# Altium PCB CircleBatBoard.PcbDoc
Units mil, origin at the board's own origin, x right, y up, seen from the top; angles counter-clockwise.
Board outline 1798.76 x 1455 mil, 2 copper layers (Top Layer, Bottom Layer); 12 components, 2 nets, 36 pads, 0 vias.
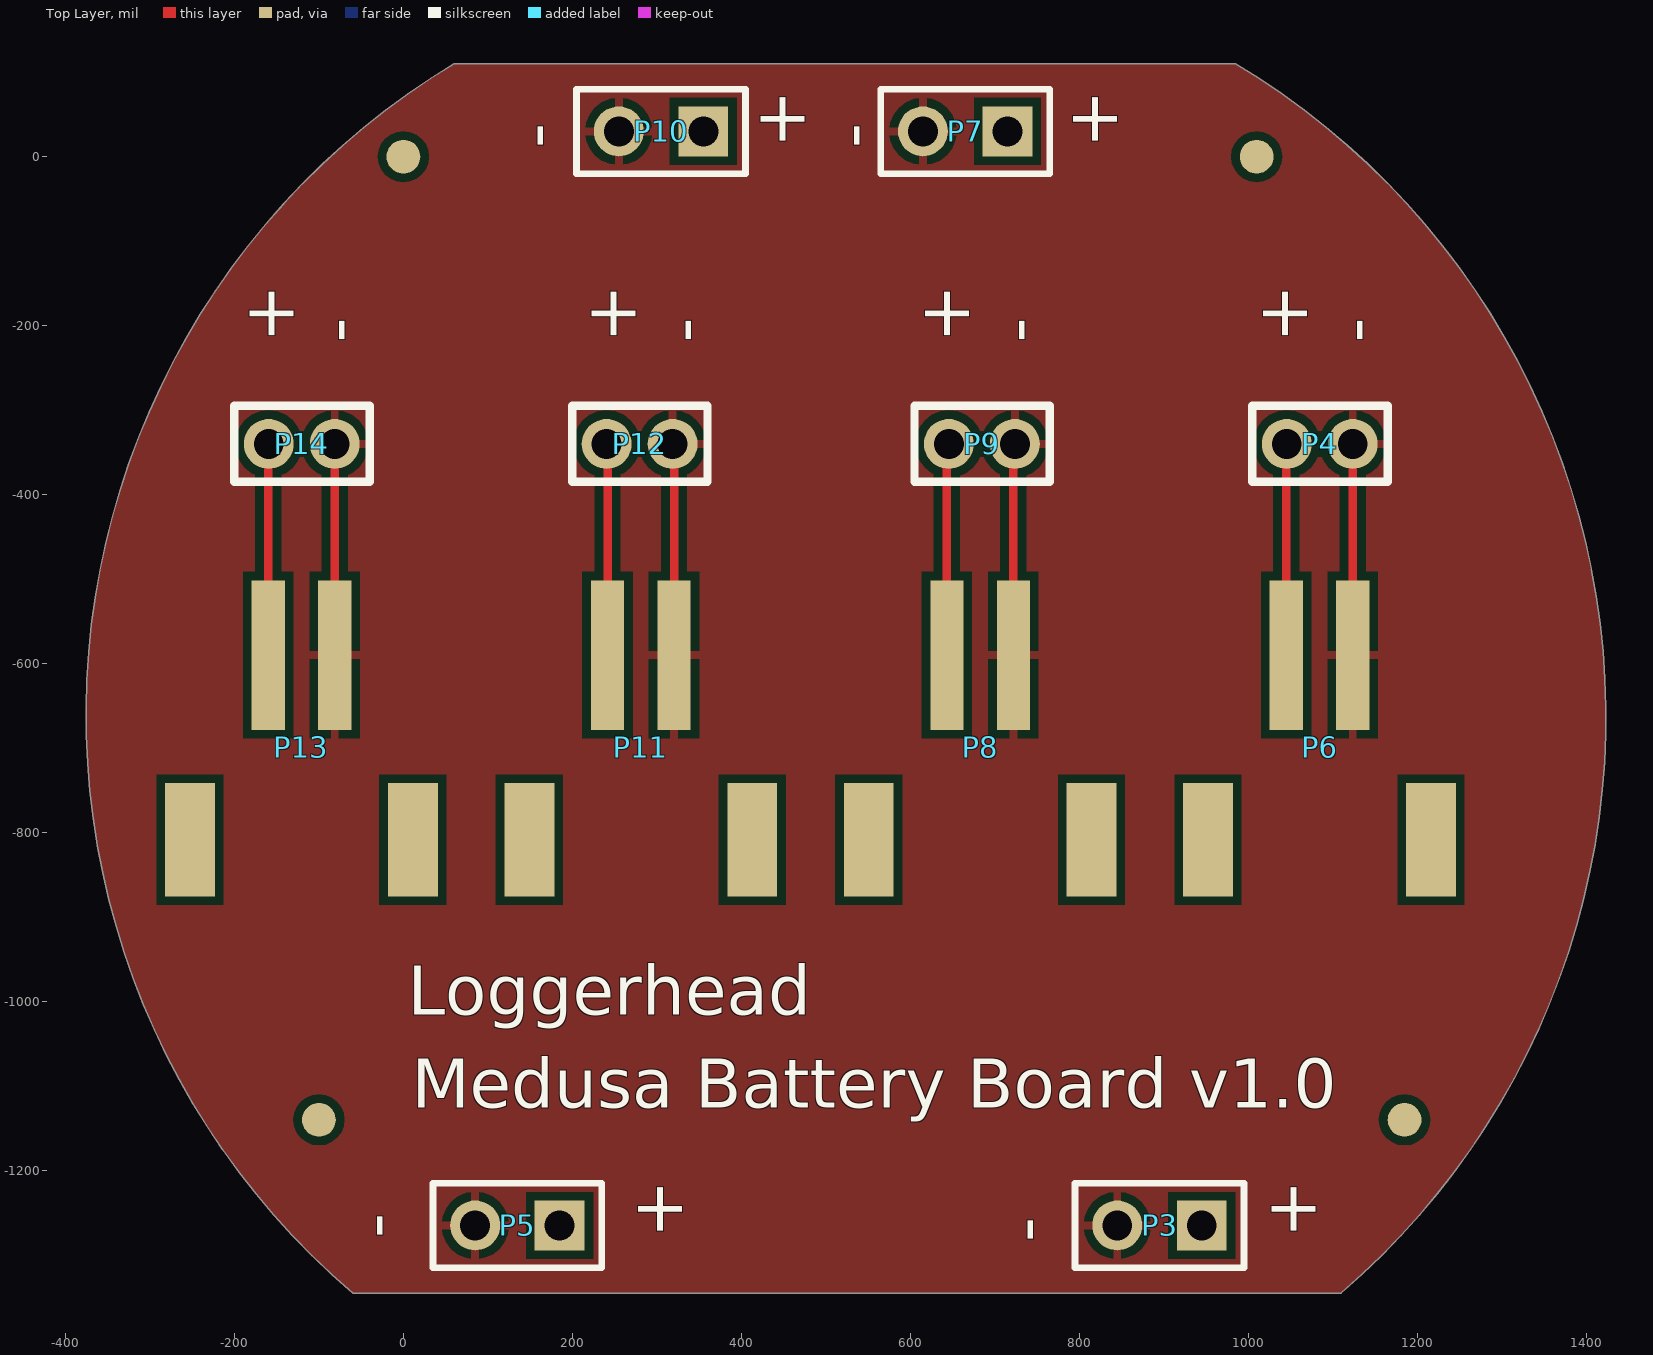
[diagram p0: Top Layer view]
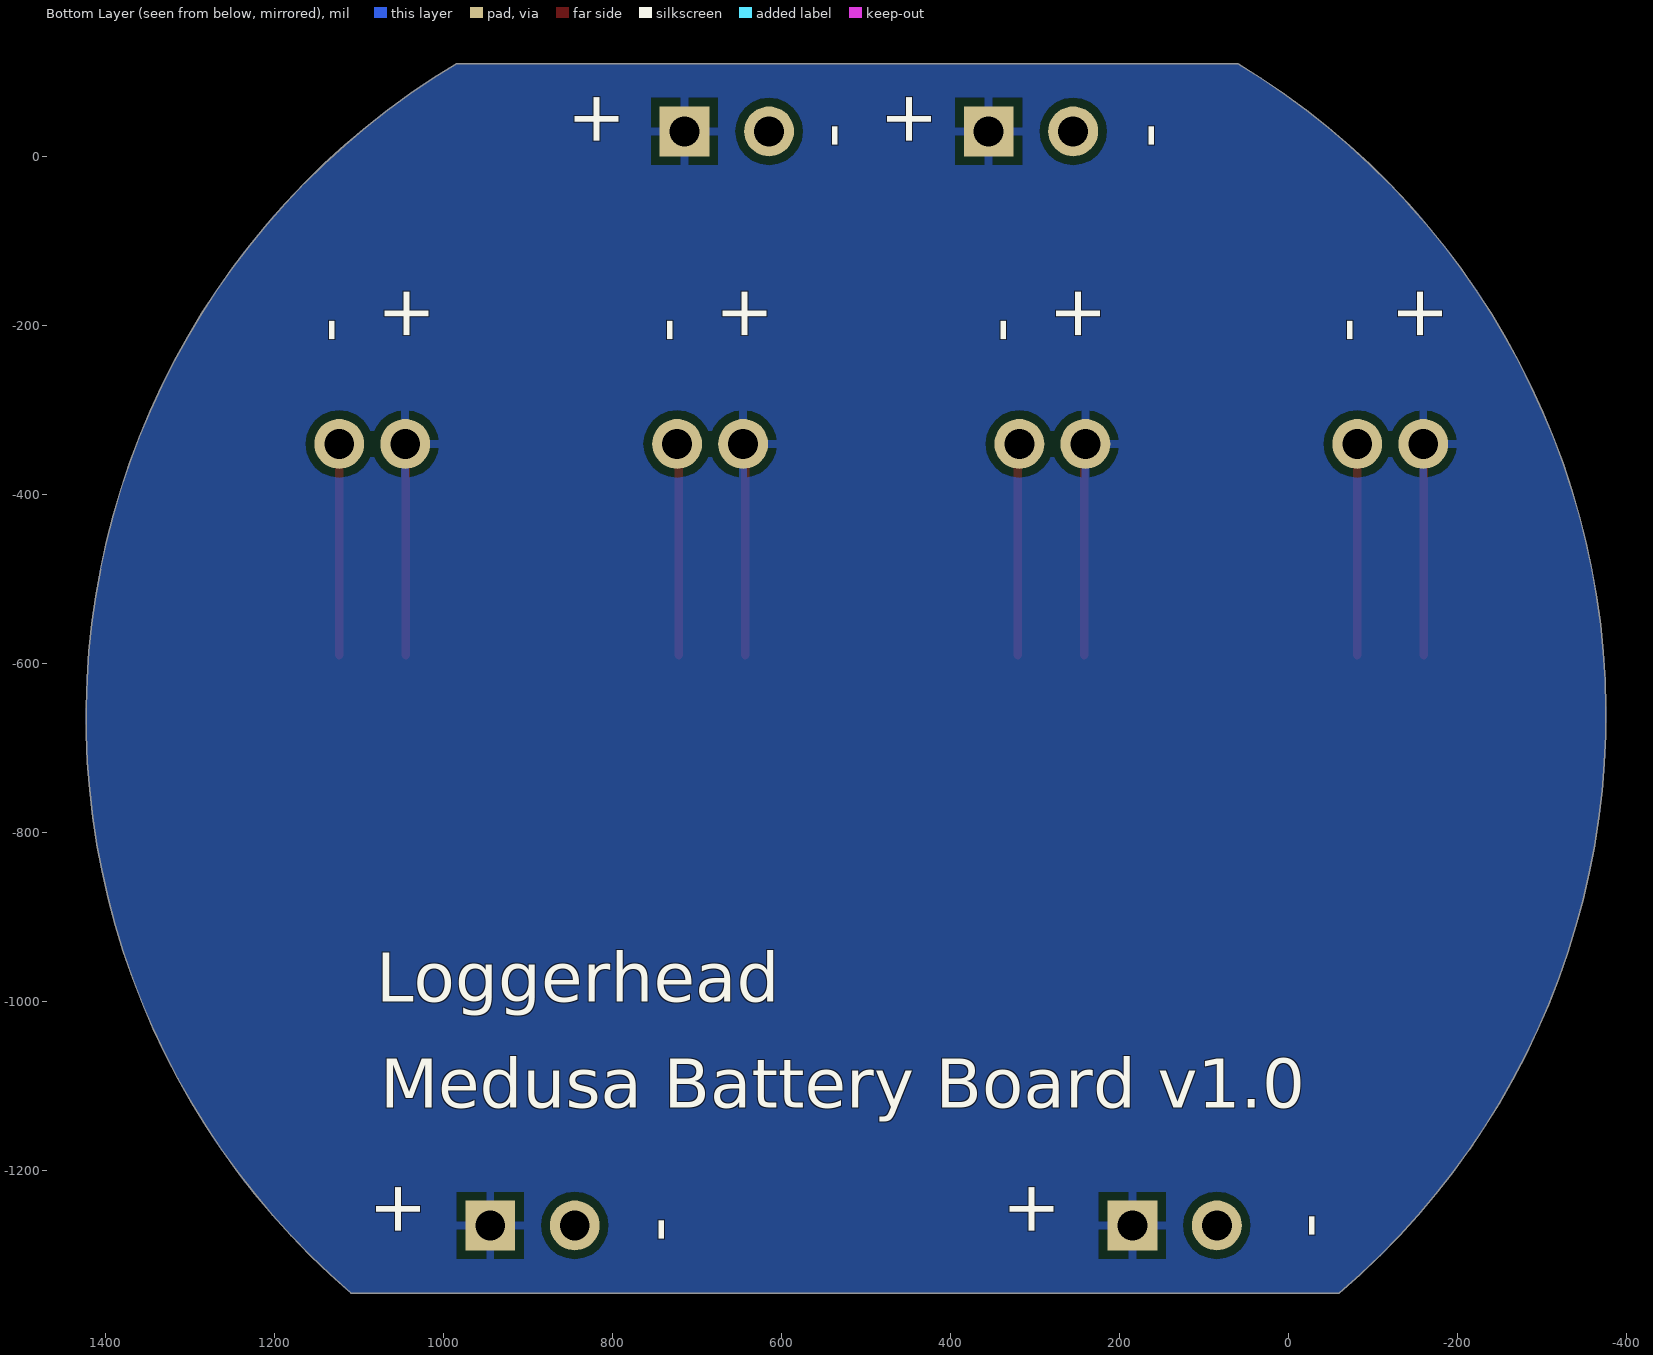
[diagram p1: Bottom Layer view, seen from below]

## Layer stack, top to bottom
Top Solder: solder mask 0.4, Solder Resist, Dk 3.5
Top Layer: signal copper 1.4
Dielectric 1: dielectric 12.6, FR-4, Dk 4.8
Bottom Layer: signal copper 1.4
Bottom Solder: solder mask 0.4, Solder Resist, Dk 3.5

## Board outline
-60,-1345 1110,-1345 ccw(c523.44,-662.52) 985,110 60,110 ccw(c524.19,-660.73)

## Design rules (kind name [scope] priority, off if disabled: settings)
Clearance [All] p1: gap=10
PolygonConnect [All] p1: connectstyle=Relief reliefconductorwidth=10 reliefentries=4 polygonreliefangle="90 Angle" airgapwidth=10
RoutingVias [All] p1: holewidth=28 width=50 viastyle="Through Hole" minholewidth=28 minwidth=50 maxholewidth=28 maxwidth=50
SolderMaskExpansion [All] p1: expansion=4
Width [All] p1: maxlimit=10 minlimit=10 preferedwidth=10
29 further rules are at their usual default settings.

## Components (designator, comment, footprint, x,y, rotation, side; value= is the part's Value field where it differs from the comment)
P3 "Header 2" HDR1X2 945,-1265 r180 top
P4 "HDR_2x1_2mm" HDR_2x1_2mm 1045,-340 r270 top
P5 "Header 2" HDR1X2 185,-1265 r180 top
P6 "JST Rt Angle" JST_2SMT 1045,-590 r0 top
P7 "Header 2" HDR1X2 715,30 r180 top
P8 "JST Rt Angle" JST_2SMT 643.33,-590 r0 top
P9 "HDR_2x1_2mm" HDR_2x1_2mm 645,-340 r270 top
P10 "Header 2" HDR1X2 355,30 r180 top
P11 "JST Rt Angle" JST_2SMT 241.67,-590 r0 top
P12 "HDR_2x1_2mm" HDR_2x1_2mm 240,-340 r270 top
P13 "JST Rt Angle" JST_2SMT -160,-590 r0 top
P14 "HDR_2x1_2mm" HDR_2x1_2mm -160,-340 r270 top

## Footprints (in the part's own frame and the unit in brackets; to place one, negate y for a bottom-side part, rotate by r counter-clockwise, add the part's x,y. Pads: shape width x height; smd on the part's side, far side on the other; paste and mask are expansions set on the pad)
HDR1X2 [mm] "Connector; Header; 2 Position"
  rect 1.5x1.5 hole 0.9: 1(0,0)
  round 1.5 hole 0.9: 2(2.54,0)
  silkscreen extent -1.27,-1.27 3.81,1.27
HDR_2x1_2mm [mm]
  round 1.5 hole 0.9: 1(0,0.016) 2(0,2)
  silkscreen extent -1.14,-1.02 1.14,3.05
JST_2SMT [mm] "JST 2 pin right angle surface mount connector"
  rect 1x4.5 smd: 1(0,0) 2(2,0)
  rect 1.5x3.4 smd: 3(-2.35,-5.55) 4(4.35,-5.55)

## Part data
P3 P5 P7 P10: "Header, 2-Pin"
P6 P8 P11 P13: library part JSTsmtRtAngle

## Free pads (board coordinates)
  round 40 smd paste-20 mask+5: 0(-100,-1140) 0(0,0) 0(1010,0) 0(1185,-1140)

## Nets (pads, with @x,y where several pads share a name; then routed paths per layer and width w, separated by ;. In a path a pad name is that pad's centre, name@x,y a point inside that pad or via, vN(x,y) a via of type N, cw(c..) or ccw(c..) an arc to the next point about the centre after c; other vN are vias at no path point)
DGND: P3.2 P4.2 P5.2 P6.2 P7.2 P8.2 P9.2 P10.2 P11.2 P12.2 P13.2 P14.2 | length 996.7
  Top Layer w10: P13.2 P14.2 ; P11.2 P12.2@320.41,-341.67 ; P8.2 P9.2@722.07,-341.67 ; P6.2 P4.2
V_BATT: P3.1 P4.1 P5.1 P6.1 P7.1 P8.1 P9.1 P10.1 P11.1 P12.1 P13.1 P14.1 | length 995.4
  Top Layer w10: P13.1 P14.1@-160,-340.63 ; P11.1 P12.1@241.67,-341.04 ; P8.1 P9.1@643.33,-342.3 ; P6.1 P4.1@1045,-340.63
pads on no net: P6.3 P6.4 P8.3 P8.4 P11.3 P11.4 P13.3 P13.4

## Polygon pours and split planes (outlines as drawn)
DGND on Top Layer "GND" (solid, pour order 6): -60,-1345 1110,-1345 ccw(c523.44,-662.52) 985,110 60,110 ccw(c524.19,-660.73)
V_BATT on Bottom Layer "VBAT" (solid, pour order 8): -60,-1345 1110,-1345 ccw(c523.44,-662.52) 985,110 60,110 ccw(c524.19,-660.73)

## Silkscreen, mask and mechanical layers (free items; w line width, h text height)
Top Overlay:
  text "-" at 185,10 h60 r90
  text "+" at 475,10 h60 r90
  text "-" at 560,10 h60 r90
  text "+" at 845,10 h60 r90
  text "+" at -130,-220 h60 r90
  text "-" at -50,-220 h60 r90
  text "+" at 275,-220 h60 r90
  text "-" at 360,-220 h60 r90
  text "+" at 670,-220 h60 r90
  text "-" at 755,-220 h60 r90
  text "+" at 1070,-220 h60 r90
  text "-" at 1155,-220 h60 r90
  text "Loggerhead" at 5,-1035 h100
  text "Medusa Battery Board v1.0" at 10,-1145 h100
  text "-" at -5,-1280 h60 r90
  text "+" at 330,-1280 h60 r90
  text "+" at 1080,-1280 h60 r90
  text "-" at 765,-1285 h60 r90
Bottom Overlay:
  text "-" at 185,10 h60 r90
  text "+" at 475,10 h60 r90
  text "-" at 560,10 h60 r90
  text "+" at 845,10 h60 r90
  text "+" at -130,-220 h60 r90
  text "-" at -50,-220 h60 r90
  text "+" at 275,-220 h60 r90
  text "-" at 360,-220 h60 r90
  text "+" at 670,-220 h60 r90
  text "-" at 755,-220 h60 r90
  text "+" at 1070,-220 h60 r90
  text "-" at 1155,-220 h60 r90
  text "Loggerhead" at 1080,-1020 h100
  text "Medusa Battery Board v1.0" at 1075,-1145 h100
  text "-" at -5,-1280 h60 r90
  text "+" at 330,-1280 h60 r90
  text "+" at 1080,-1280 h60 r90
  text "-" at 765,-1285 h60 r90
Mechanical 1:
  the board outline again, w10